# Altium PCB 00.main.PcbDoc (part 1 of 2)
Units mm, origin at the board's own origin, x right, y up, seen from the top; angles counter-clockwise.
Board outline 186 x 60 mm, 2 copper layers (Top Layer, Bottom Layer); 117 components, 80 nets, 547 pads, 161 vias.
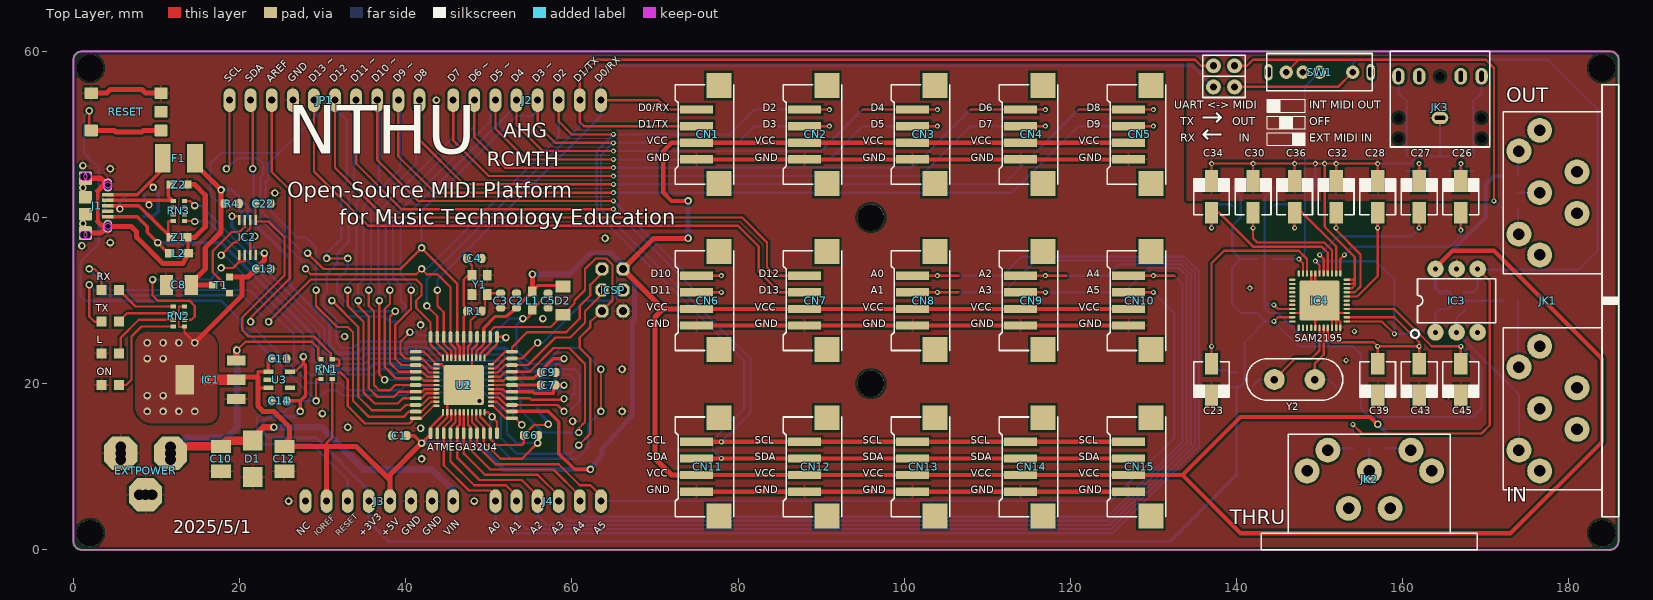
[diagram p0: Top Layer view]
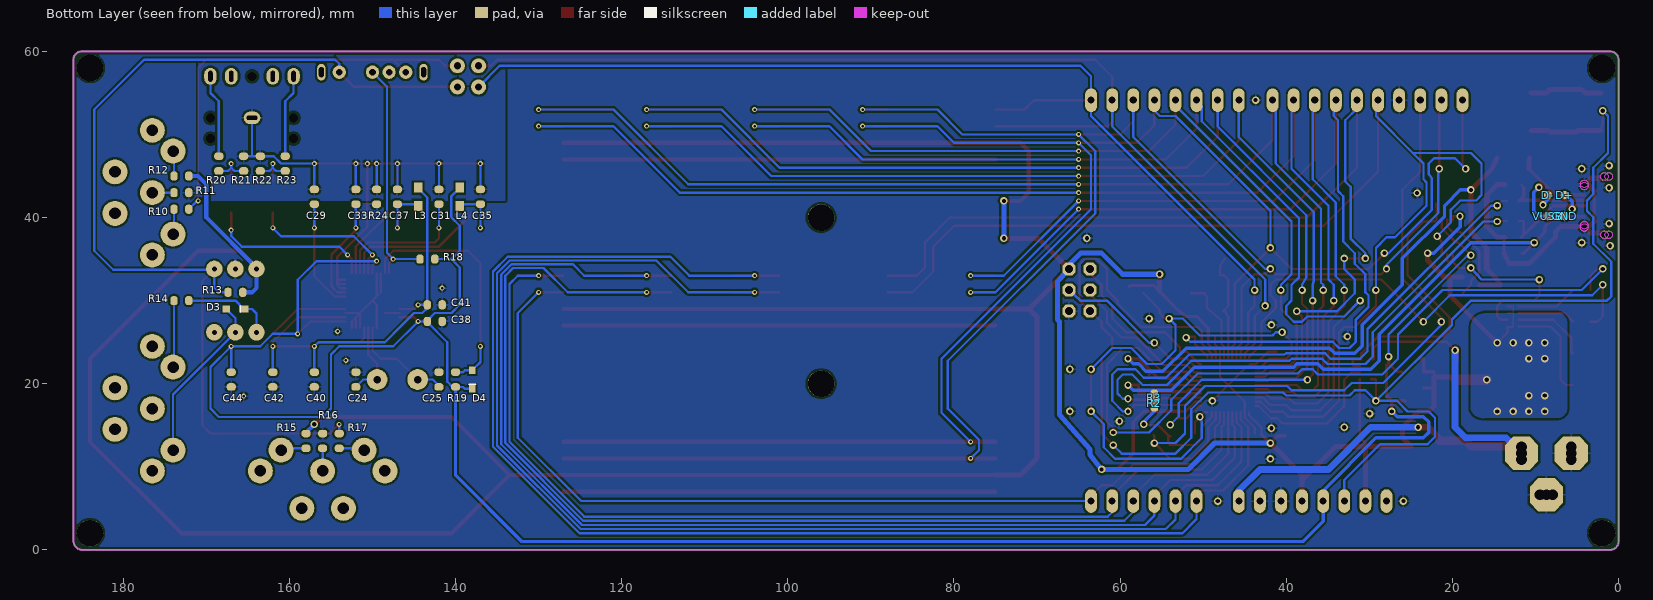
[diagram p1: Bottom Layer view, seen from below]

## Layer stack, top to bottom
Top Layer: signal copper 0.0356
Dielectric: dielectric 0.32, FR-4, Dk 4.8
Bottom Layer: signal copper 0.0356

## Board outline
1,0 cw(c1,1) 0,1 0,59 cw(c1,59) 1,60 185,60 cw(c185,59) 186,59 186,1.1 cw(c184.9,1.1) 184.9,0
cut-out: 4.14,38.364 ccw(c4.14,38.814) 4.59,38.814 ccw(c4.14,38.814) 4.14,39.264 ccw(c4.14,38.814) 3.69,38.814 ccw(c4.14,38.814)
cut-out: 4.14,38.618 ccw(c4.14,39.068) 4.59,39.068 ccw(c4.14,39.068) 4.14,39.518 ccw(c4.14,39.068) 3.69,39.068 ccw(c4.14,39.068)
cut-out: 1.194,37.475 ccw(c1.194,37.925) 1.644,37.925 ccw(c1.194,37.925) 1.194,38.375 ccw(c1.194,37.925) 0.744,37.925 ccw(c1.194,37.925)
cut-out: 1.702,37.475 ccw(c1.702,37.925) 2.152,37.925 ccw(c1.702,37.925) 1.702,38.375 ccw(c1.702,37.925) 1.252,37.925 ccw(c1.702,37.925)
cut-out: 1.194,44.485 ccw(c1.194,44.935) 1.644,44.935 ccw(c1.194,44.935) 1.194,45.385 ccw(c1.194,44.935) 0.744,44.935 ccw(c1.194,44.935)
cut-out: 1.702,44.485 ccw(c1.702,44.935) 2.152,44.935 ccw(c1.702,44.935) 1.702,45.385 ccw(c1.702,44.935) 1.252,44.935 ccw(c1.702,44.935)
cut-out: 4.14,43.342 ccw(c4.14,43.792) 4.59,43.792 ccw(c4.14,43.792) 4.14,44.242 ccw(c4.14,43.792) 3.69,43.792 ccw(c4.14,43.792)
cut-out: 4.14,43.596 ccw(c4.14,44.046) 4.59,44.046 ccw(c4.14,44.046) 4.14,44.496 ccw(c4.14,44.046) 3.69,44.046 ccw(c4.14,44.046)

## Design rules (kind name [scope] priority, off if disabled: settings)
Clearance [All] p1: gap=0.152
HoleSize [All] p1: absolutevalues=TRUE maxlimit=5.08 minlimit=0.025 maxpercent=80.000 minpercent=20.000
HoleToHoleClearance [All] p1: gap=0.127 allowstackedmicrovias=TRUE
MinimumSolderMaskSliver [All] p1: minsoldermaskwidth=0
PolygonConnect [All] p1: connectstyle=Relief reliefconductorwidth=0.254 reliefentries=4 polygonreliefangle="90 Angle" airgapwidth=0.254
RoutingVias [All] p1: holewidth=0.3 width=0.6 viastyle="Through Hole" minholewidth=0.3 minwidth=0.6 maxholewidth=0.5 maxwidth=1
SilkToSilkClearance [All] p1 off: silktosilkclearance=0.254
SilkToSolderMaskClearance [IsPad] p1 off: minsilkscreentomaskgap=0.254 clearancetoexposedcopper=TRUE
SolderMaskExpansion [All] p1: expansion=0.102
Width [All] p1: maxlimit=2.54 minlimit=0.203 preferedwidth=0.305
23 further rules are at their usual default settings.

## Classes and differential pairs
component class 02.Interfaces: CN1 CN2 CN3 CN4 CN5 CN6 CN7 CN8 CN9 CN10 CN11 CN12 CN13 CN14 CN15 D3 IC3 JK1 JK2 R10 R11 R12 R13 R14 R15 R16 R17 "UART <-> MIDI"
component class 01.Leonardo_Rev3d: C1 C2 C3 C4 C5 C6 C7 C8 C9 C10 C11 C12 C13 C14 C22 D1 D2 D+ D- EXTPOWER F1 GND IC1 IC2 ICSP J1 J2 J3 J4 JP1 L L1 L2 ON R1 R2 R3 R4 RESET RN1 RN2 RN3 RX T1 TX U1 U2 U3 VUSB Y1 Z1 Z2
component class 03.SAM2195: C23 C24 C25 C26 C27 C28 C29 C30 C31 C32 C33 C34 C35 C36 C37 C38 C39 C40 C41 C42 C43 C44 C45 D4 IC4 JK3 L3 L4 R18 R19 R20 R21 R22 R23 R24 SW1 Y2

## Components (designator, comment, footprint, x,y, rotation, side; value= is the part's Value field where it differs from the comment)
C1 "100n" C0603-ROUND 39.235,13.755 r180 top
C2 "100n" C0603-ROUND 53.34,30 r90 top
C3 "22p" C0603-ROUND 51.435,30 r90 top
C4 "22p" C0603-ROUND 48.26,35.08 r0 top
C5 "1uF" C0603-ROUND 57.15,30 r270 top
C6 "100n" C0603-ROUND 55.075,13.78 r0 top
C7 "1uF" C0603-ROUND 57.15,19.84 r0 top
C8 "10u" SMC_B 12.7,31.905 r180 top
C9 "100n" C0603-ROUND 57.15,21.364 r180 top
C10 "10u" SMC_B 17.78,10.95 r270 top
C11 "1uF" C0603-ROUND 24.765,23.015 r180 top
C12 "10u" SMC_B 25.4,10.95 r270 top
C13 "100n" C0603-ROUND 22.86,33.81 r0 top
C14 "1uF" C0603-ROUND 24.765,17.935 r0 top
C22 "100n" C0603-ROUND 22.86,41.684 r180 top
C23 "1uF" "Cap SMD 4x5.3" 137,20.5 r270 top
C24 "22pF" C0603-ROUND 152,20.5 r270 bottom
C25 "22pF" C0603-ROUND 142,20.5 r270 bottom
C26 "2.2uF" "Cap SMD 4x5.3" 167,42.5 r90 top
C27 "2.2uF" "Cap SMD 4x5.3" 162,42.5 r90 top
C28 "10uF" "Cap SMD 4x5.3" 157,42.5 r90 top
C29 "100nF" C0603-ROUND 157,42.5 r90 bottom
C30 "1uF" "Cap SMD 4x5.3" 142,42.5 r90 top
C31 "100nF" C0603-ROUND 142,42.5 r90 bottom
C32 "10uF" "Cap SMD 4x5.3" 152,42.5 r90 top
C33 "100nF" C0603-ROUND 152,42.5 r90 bottom
C34 "1uF" "Cap SMD 4x5.3" 137,42.5 r90 top
C35 "100nF" C0603-ROUND 137,42.5 r90 bottom
C36 "1uF" "Cap SMD 4x5.3" 147,42.5 r90 top
C37 "100nF" C0603-ROUND 147,42.5 r90 bottom
C38 "100nF" C0603-ROUND 142.5,27.5 r180 bottom
C39 "1uF" "Cap SMD 4x5.3" 157,20.5 r270 top
C40 "100nF" C0603-ROUND 157,20.5 r270 bottom
C41 "100nF" C0603-ROUND 142.5,29.5 r180 bottom
C42 "470pF" C0603-ROUND 162,20.5 r270 bottom
C43 "2.2uF" "Cap SMD 4x5.3" 162,20.5 r270 top
C44 "100nF" C0603-ROUND 167,20.5 r270 bottom
C45 "4.7uF" "Cap SMD 4x5.3" 167,20.5 r270 top
CN1 "2.54mm 1X4" Grove-4P-180D 75,50 r90 top
CN2 "2.54mm 1X4" Grove-4P-180D 88,50 r90 top
CN3 "2.54mm 1X4" Grove-4P-180D 101,50 r90 top
CN4 "2.54mm 1X4" Grove-4P-180D 114,50 r90 top
CN5 "2.54mm 1X4" Grove-4P-180D 127,50 r90 top
CN6 "2.54mm 1X4" Grove-4P-180D 75,30 r90 top
CN7 "2.54mm 1X4" Grove-4P-180D 88,30 r90 top
CN8 "2.54mm 1X4" Grove-4P-180D 101,30 r90 top
CN9 "2.54mm 1X4" Grove-4P-180D 114,30 r90 top
CN10 "2.54mm 1X4" Grove-4P-180D 127,30 r90 top
CN11 "2.54mm 1X4" Grove-4P-180D 75,10 r90 top
CN12 "2.54mm 1X4" Grove-4P-180D 88,10 r90 top
CN13 "2.54mm 1X4" Grove-4P-180D 101,10 r90 top
CN14 "2.54mm 1X4" Grove-4P-180D 114,10 r90 top
CN15 "2.54mm 1X4" Grove-4P-180D 127,10 r90 top
D1 "M7" SMB 21.59,10.95 r270 top
D2 "CD1206-S01575" MINIMELF 58.928,30 r270 top
D3 "1N4148" SOD-323 166.5,29 r180 bottom
D4 "1N4148" SOD-323 138,20.5 r270 bottom
D+ "DNP" TP-1.00MM 6.5,42.7 r0 top
D- "DNP" TP-1.00MM 8.509,42.7 r0 top
EXTPOWER "POWERSUPPLY_DC21MMX" POWERSUPPLY_DC-21MM 5.334,11.712 r90 top
F1 "MF-MSMF050-2 500mA" L1812 12.7,47.145 r180 top
GND "DNP" TP-1.00MM 6.5,40.16 r0 top
IC1 "NCP1117ST50T3G" SOT223 16.51,20.475 r90 top
IC2 "LMV358IDGKR" MSOP08 20.955,37.62 r0 top
IC3 "PC900" DIP-6 166.5,30 r90 top
IC4 "SAM2195" QFN44ML7X7 150,30 r270 top
ICSP "ICSP" 2X03 64.897,31.27 r270 top
J1 "USB Micro" CON2_USB_MICRO_B_AT 1.448,41.43 r270 top
J2 "8x1F-H8.5" 1X08 54.61,54.13 r180 top
J3 "8x1F-H8.5" 1X08 36.83,5.87 r0 top
J4 "6x1F-H8.5" 1X06 57.15,5.87 r0 top
JK1 "Jack MIDI-Dual" HDC-052 177.5,30 r90 top
JK2 "Jack MIDI" HDC-052-01 156,8.5 r0 top
JK3 "Jack 3.5mm PhoneJack" "PhoneJack EJ05-06-PF" 164.5,52 r90 top
JP1 "10x1F-H8.5" 1X10 30.226,54.13 r180 top
L "Yellow" CHIPLED_0805 4.445,23.65 r90 top
L1 "MH2029-300Y" 0805 55.245,30 r270 top
L2 "MH2029-300Y" 0805 12.7,35.715 r0 top
L3 "742792093" 0805 144.5,42.5 r270 bottom
L4 "742792093" 0805 139.5,42.5 r270 bottom
ON "Green" CHIPLED_0805 4.445,19.84 r90 top
R1 "1M" R0603-ROUND 48.26,28.73 r0 top
R2 "NM" R0402 55.88,17.656 r90 bottom
R3 "NM" R0402 55.88,18.291 r90 bottom
R4 "10K" R0603-ROUND 19.05,41.684 r180 top
R10 "220R" R0603-ROUND 173,41 r0 bottom
R11 "0R" R0603-ROUND 173,43 r0 bottom
R12 "220R" R0603-ROUND 173,45 r0 bottom
R13 "220R" R0603-ROUND 166.5,31 r180 bottom
R14 "220R" R0603-ROUND 173,30 r180 bottom
R15 "220R" R0603-ROUND 158,13.111 r270 bottom
R16 "0R" R0603-ROUND 156,13.111 r270 bottom
R17 "220R" R0603-ROUND 154,13.111 r270 bottom
R18 "100K NC" R0603-ROUND 143.389,35 r0 bottom
R19 "10K" R0603-ROUND 140,20.5 r270 bottom
R20 "220" R0603-ROUND 168.5,46.5 r270 bottom
R21 "3.3K" R0603-ROUND 165.5,46.5 r90 bottom
R22 "3.3K" R0603-ROUND 163.5,46.5 r270 bottom
R23 "220" R0603-ROUND 160.5,46.5 r270 bottom
R24 "0" R0603-ROUND 149.5,42.5 r90 bottom
RESET "TS42" TS42 6.35,52.733 r180 top
RN1 "10K" CAY16 30.48,21.745 r270 top
RN2 "1K" CAY16 12.7,28.095 r90 top
RN3 "22R" CAY16 12.7,40.795 r90 top
RX "Yellow" CHIPLED_0805 4.445,31.27 r90 top
SW1 "Switch 1P3T" "SW 1P3T - SS13D01" 150,57.5 r0 top
T1 "FDN340P" SOT-23 17.78,31.905 r270 top
TX "Yellow" CHIPLED_0805 4.445,27.46 r90 top
U1 "ATMEGA32U4-XUMU" QFN44ML7X7 46.99,19.84 r180 top
U2 "ATMEGA32U4" TQFP44-PAD 46.99,19.84 r180 top
U3 "LP2985-33DBVR" SOT23-DBV 24.765,20.475 r270 top
"UART <-> MIDI" "2X2P" A2541WV0-2X2P 138.5,57 r90 top
VUSB "DNP" TP-1.00MM 8.509,40.16 r90 top
Y1 "16MHz KX-7" CRYSTAL-3.2-2.5 48.895,31.905 r270 top
Y2 "9.6MHz" "HC-49S DIP" 147,20.5 r0 top
Z1 "CG0603MLC-05E" CT/CN0603 12.7,37.62 r0 top
Z2 "CG0603MLC-05E" CT/CN0603 12.7,43.97 r0 top

## Footprints (in the part's own frame and the unit in brackets; to place one, negate y for a bottom-side part, rotate by r counter-clockwise, add the part's x,y. Pads: shape width x height; smd on the part's side, far side on the other; paste and mask are expansions set on the pad)
1X06 [mil] "1X06"
  oval 56x112 hole 33.46: 1(-250,0) 2(-150,0) 3(-50,0) 4(50,0) 5(150,0) 6(250,0)
1X08 [mil] "1X08"
  oval 56x112 hole 33.46: 1(-350,0) 2(-250,0) 3(-150,0) 4(-50,0) 5(50,0) 6(150,0) 7(250,0) 8(350,0)
1X10 [mil] "1X10"
  oval 56x112 hole 33.46: 1(-450,0) 2(-350,0) 3(-250,0) 4(-150,0) 5(-50,0) 6(50,0) 7(150,0) 8(250,0) 9(350,0) 10(450,0)
2X03 [mm] "2X03"
  oct 1.55x1.55 / inner round 1.432 / far side oct 1.55x1.55 hole 0.95: 1(-2.54,-1.27) 2(-2.54,1.27) 3(0,-1.27) 4(0,1.27) 5(2.54,-1.27) 6(2.54,1.27)
0805 [mm] "0805"
  rect 1.2x1 smd: 1(-1.1,0) 2(1.1,0)
A2541WV0-2X2P [mm]
  round 1.8 hole 0.85: 1(-1.27,-1.27) 2(-1.27,1.27) 3(1.27,-1.27) 4(1.27,1.27)
  silkscreen extent -2.54,-2.54 2.54,2.54
C0603-ROUND [mil] "C0603-ROUND"
  rrect80% 35.37x43.31 smd: 1(-35,0) 2(35,0)
"Cap SMD 4x5.3" [mm]
  rect 2.6x1.6 smd: 1(-1.9,0) 2(1.9,0)
  silkscreen extent -2.15,-2.15 2.25,2.15
CAY16 [mm] "CAY16"
  rect 0.5x0.65 smd: 1(-1.2,-0.675) 2(-0.4,-0.675) 3(0.4,-0.675) 4(1.2,-0.675) 5(1.2,0.675) 6(0.4,0.675) 7(-0.4,0.675) 8(-1.2,0.675)
CHIPLED_0805 [mm] "CHIPLED_0805"
  rect 1.2x1.2 smd: A(0,-1.05) C(0,1.05)
CON2_USB_MICRO_B_AT [mil] "CON2_USB_MICRO_B_AT"
  rrect10% 16x53 smd: P1(-52,106) P2(-26,106) P3(0,106) P4(26,106) P5(52,106)
  rrect20% 65x61 smd paste-32.5: S1(-130,0) S2(130,0)
  rrect80% 60x40 smd paste-30: S3(-98,106) S4(98,106)
  rrect10% 60x60 smd: S5(-40,0) S6(40,0)
CRYSTAL-3.2-2.5 [mm] "CRYSTAL-3.2-2.5"
  rect 1.3x1.05 smd: 1(-1.15,-0.925) 2(1.15,-0.925) 3(1.15,0.925) 4(-1.15,0.925)
CT/CN0603 [mm] "CT/CN0603"
  rect 1x1 smd: 1(-1,0) 2(1,0)
DIP-6 [mm]
  round 2 hole 0.6: 1(-3.81,2.54) 2(-3.81,0) 3(-3.81,-2.54) 4(3.81,-2.54) 5(3.81,0) 6(3.81,2.54)
  silkscreen extent -4.5,-4.7 2.65,5.5
Grove-4P-180D [mm]
  rect 1x4 smd: 1(3,0) 2(1,0) 3(-1,0) 4(-3,0)
  rect 3x3 smd: ""(-5.9,-2.7) ""(5.9,-2.7)
  silkscreen extent -6,-4.5 6,2.55
"HC-49S DIP" [mm]
  round 2.5 hole 0.9: 1(-2.44,0) 2(2.44,0)
  silkscreen extent -5.8,-2.5 5.8,2.5
HDC-052 [mm]
  round 3 hole 1.4: 1(20.5,1) 1'(-5.5,1) 2(13,1) 2'(-13,1) 3(5.5,1) 3'(-20.5,1) 4(18,3.5) 4'(-8,3.5) 5(8,3.5) 5'(-18,3.5) G(-15.5,-3.5) G(-10.5,-3.5) G(10.5,-3.5) G(15.5,-3.5)
  silkscreen extent -26,-8.5 26,5.4
HDC-052-01 [mm]
  round 3 hole 1.4: 1(7.5,1) 2(0,1) 3(-7.5,1) 4(5,3.5) 5(-5,3.5) G(-2.5,-3.5) G(2.5,-3.5)
  silkscreen extent -13,-8.5 13,5.4
L1812 [mm] "L1812"
  rect 1.9x3.4 smd: 1(-1.95,0) 2(1.95,0)
MINIMELF [mm] "MINIMELF"
  rect 1.4x1.8 smd: A(1.7,0) C(-1.7,0)
MSOP08 [mm] "MSOP08"
  rect 0.3x1.2 smd: 1(-0.976,-2.113) 2(-0.326,-2.113) 3(0.324,-2.113) 4(0.974,-2.113) 5(0.974,2.112) 6(0.324,2.112) 7(-0.326,2.112) 8(-0.976,2.112)
"PhoneJack EJ05-06-PF" [mm]
  round 0 hole 1.1: 0(-2.5,5) 0(-2.5,-5) 0(0,5) 0(0,-5) 0(5,0)
  oval 1.5x2 hole 0.5 slot 1.3 at 90 deg: 1(0,0)
  oval 2x1.5 hole 0.5 slot 1.3 at 0 deg: 2(5,5) 3(5,2.5) 4(5,-2.5) 5(5,-5)
  silkscreen extent -3.5,-6 8,6
POWERSUPPLY_DC-21MM [mil] "POWERSUPPLY_DC-21MM"
  round 76.77 hole 51.18: 1(-200,-162) 1(-200,-102) 2(-33,-250) 2(27,-250) 3(-33,-14) 3(27,-14)
  oct 157.48x157.48 / inner round 145.49 / far side oct 157.48x157.48 hole 51.18: 1(-200,-132) 2(-3,-250) 3(-3,-14)
QFN44ML7X7 [mm] "QFN44ML7X7"
  rrect80% 0.75x0.275 smd: 1(-3.275,2.5) 2(-3.275,2) 3(-3.275,1.5) 4(-3.275,1) 5(-3.275,0.5) 6(-3.275,0) 7(-3.275,-0.5) 8(-3.275,-1) 9(-3.275,-1.5) 10(-3.275,-2) 11(-3.275,-2.5) 23(3.275,-2.5) 24(3.275,-2) 25(3.275,-1.5) 26(3.275,-1) 27(3.275,-0.5) 28(3.275,0) 29(3.275,0.5) 30(3.275,1) 31(3.275,1.5) 32(3.275,2) 33(3.275,2.5)
  rrect80% 0.275x0.75 smd: 12(-2.5,-3.275) 13(-2,-3.275) 14(-1.5,-3.275) 15(-1,-3.275) 16(-0.5,-3.275) 17(0,-3.275) 18(0.5,-3.275) 19(1,-3.275) 20(1.5,-3.275) 21(2,-3.275) 22(2.5,-3.275) 34(2.5,3.275) 35(2,3.275) 36(1.5,3.275) 37(1,3.275) 38(0.5,3.275) 39(0,3.275) 40(-0.5,3.275) 41(-1,3.275) 42(-1.5,3.275) 43(-2,3.275) 44(-2.5,3.275)
  rrect10% 4.826x4.826 smd paste-2.413 mask-2.413: EXP(0,0)
R0402 [mm] "R0402"
  rrect90% 0.7x0.9 smd: 1(-0.65,0) 2(0.65,0)
R0603-ROUND [mil] "R0603-ROUND"
  rrect80% 35.37x43.31 smd: 1(-35,0) 2(35,0)
SMB [mm] "SMB"
  rect 2.4x2.4 smd: A(2.2,0) C(-2.2,0)
SMC_B [mm] "SMC_B"
  rect 1.6x2.4 smd: +(-1.5,0) -(1.5,0)
SOD-323 [mm] "SOT23, 3-Leads, Body 2.9x1.3mm, Pitch 0.95mm, Lead Span 2.5mm, IPC Medium Density"
  rect 0.9x0.8 smd: 1(-1.125,0) 2(1.125,0)
  silkscreen extent 0.57,-0.4 0.57,0.4
SOT23-DBV [mm] "SOT23-DBV"
  rect 0.55x1.2 smd: 1(-0.95,-1.3) 2(0,-1.3) 3(0.95,-1.3) 4(0.95,1.3) 5(-0.95,1.3)
SOT223 [mil] "SOT223"
  rect 48x88 smd: 1(-91,-122) 2(0,-122) 3(91,-122)
  rect 141.73x86.61 smd: 4(0,122.01)
SOT-23 [mil] "SOT-23"
  rect 31x35 smd: 1(1,-40) 2(-37,40) 3(39,40)
"SW 1P3T - SS13D01" [mm]
  oval 1x2 hole 0.6 slot 1.2 at 90 deg: 0(-6.15,0) 0(6.15,0)
  round 1.6 hole 0.8: 1(-4,0) 2(-2,0) 3(4,0) COM(0,0)
  silkscreen extent -6.35,-2.25 6.35,2.25
TP-1.00MM [mm] "TP-1.00MM"
  rrect100% 1x1 smd far side paste-0.5: X(0,0)
TQFP44-PAD [mm] "TQFP44-PAD"
  rrect80% 1.4x0.45 smd: 1(-5.8,4) 2(-5.8,3.2) 3(-5.8,2.4) 4(-5.8,1.6) 5(-5.8,0.8) 6(-5.8,0) 7(-5.8,-0.8) 8(-5.8,-1.6) 9(-5.8,-2.4) 10(-5.8,-3.2) 11(-5.8,-4) 23(5.8,-4) 24(5.8,-3.2) 25(5.8,-2.4) 26(5.8,-1.6) 27(5.8,-0.8) 28(5.8,0) 29(5.8,0.8) 30(5.8,1.6) 31(5.8,2.4) 32(5.8,3.2) 33(5.8,4)
  rrect80% 0.45x1.4 smd: 12(-4,-5.8) 13(-3.2,-5.8) 14(-2.4,-5.8) 15(-1.6,-5.8) 16(-0.8,-5.8) 17(0,-5.8) 18(0.8,-5.8) 19(1.6,-5.8) 20(2.4,-5.8) 21(3.2,-5.8) 22(4,-5.8) 34(4,5.8) 35(3.2,5.8) 36(2.4,5.8) 37(1.6,5.8) 38(0.8,5.8) 39(0,5.8) 40(-0.8,5.8) 41(-1.6,5.8) 42(-2.4,5.8) 43(-3.2,5.8) 44(-4,5.8)
  rrect100% 1x1 smd: P$1(0,0)
TS42 [mm] "TS42"
  rrect15% 1.6x1.4 smd: 1(-4.2,2.25) 2(4.2,2.25) 3(-4.2,-2.25) 4(4.2,-2.25)
  rrect15% 1.6x1.4 smd paste-0.8: 5(-4.2,0)

## Part data
C1 C2 C3 C4 C5 C6 C7 C9 C11 C13 C14 C22: library part C-EUC0603, "CAPACITOR, European symbol"
C8 C10 C12: library part CPOL-EUSMCB, "POLARIZED CAPACITOR, European symbol"
C23 C26 C27 C28 C30 C32 C34 C36 C39 C43 C45: library part "Capacitor Polar"
C24 C25 C29 C31 C33 C35 C37 C38 C40 C41 C42 C44: library part "Capacitor Non-Polar"
CN1 CN2 CN3 CN4 CN5 CN6 CN7 CN8 CN9 CN10 CN11 CN12 CN13 CN14 CN15: library part "Connector 1X4"
D1: library part DIODE-SMB, "DIODE"
D2: library part DIODE-MINIMELF, "DIODE"
D3 D4: library part "Diode 1N4148"
D+ D- GND VUSB: library part TPTP-1.00MM, "Testpoint"
F1: library part L-EUL1812, "INDUCTOR, European symbol"
IC1: library part MC33269ST*, "Adjustable Output Low Dropout Voltage Regulator 800 mA   Source: http://www.onsemi.com/pub/Collateral/MC33269-D.PDF"
IC2: library part LMV358?*MM, "Dual General Purpose, Low Voltage, Rail-to-Rail Output Operational Amplifiers   Source: http://www.national.com/mpf/LM/LMV321.html http://www.national.com/dt/lmv_qual.pdf"
IC3: library part "Optoisolator PC900", "Sharp PC900 Optoisolator"
IC4: library part "IC SAM2195"
ICSP: library part PINHD-2X3, "PIN HEADER"
J1: library part USB-MICRO-LEGACY
J2 J3: library part PINHD-1X8, "PIN HEADER"
J4: library part PINHD-1X6, "PIN HEADER"
JK1: "Dual MIDI Connector"
JP1: library part PINHD-1X10, "PIN HEADER"
L ON RX TX: library part LEDCHIPLED_0805, "LED   OSRAM: - CHIPLED LG R971, LG N971, LY N971, LG Q971, LY Q971, LO R971, LY R971 LH N974, LH R974 LS Q976, LO Q976, LY Q976 LO Q996 - Hyper CHIPLED LW Q18S LB Q993, LB Q99A, LB R99A - SideLED LS A670, LO A670, LY A670, LG A670, LP A670 LB A673, LV A673, LT A673, LW A673 LH A674 LY A675 LS A676, LA A676, LO A676, LY A676, LW A676 LS A679, LY A679, LG A679 -  Hyper Micro SIDELED® LS Y876, LA Y876, LO Y876, LY Y876 LT Y87S - SmartLED LW L88C, LW L88S LB L89C, LB L89S, LG L890 LS L89K, LO L89K, LY L89K LS L896, LA L896, LO L896, LY L896 - TOPLED LS T670, LO T670, LY T670, LG T670, LP T670 LSG T670, LSP T670, LSY T670, LOP T670, LYG T670 LG T671, LOG T671, LSG T671 LB T673, LV T673, LT T673, LW T673 LH T674 LS T676, LA T676, LO T676, LY T676, LB T676, LH T676, LSB T676, LW T676 LB T67C, LV T67C, LT T67C, LS T67K, LO T67K, LY T67K, LW E67C LS E67B, LA E67B, LO E67B, LY E67B, LB E67C, LV E67C, LT E67C LW T67C LS T679, LY T679, LG T679 LS T770, LO T770, LY T770, LG T770, LP T770 LB T773, LV T773, LT T773, LW T773 LH T774 LS E675, LA E675, LY E675, LS T675 LS T776, LA T776, LO T776, LY T776, LB T776 LHGB T686 LT T68C, LB T68C - Hyper Mini TOPLED® LB M676 - Mini TOPLED Santana® LG M470 LS M47K, LO M47K, LY M47K    Source: http://www.osram.convergy.de   LUXEON: - LUMILED® LXK2-PW12-R00, LXK2-PW12-S00, LXK2-PW14-U00, LXK2-PW14-V00 LXK2-PM12-R00, LXK2-PM12-S00, LXK2-PM14-U00 LXK2-PE12-Q00, LXK2-PE12-R00, LXK2-PE12-S00, LXK2-PE14-T00, LXK2-PE14-U00 LXK2-PB12-K00, LXK2-PB12-L00, LXK2-PB12-M00, LXK2-PB14-N00, LXK2-PB14-P00, LXK2-PB14-Q00 LXK2-PR12-L00, LXK2-PR12-M00, LXK2-PR14-Q00, LXK2-PR14-R00 LXK2-PD12-Q00, LXK2-PD12-R00, LXK2-PD12-S00 LXK2-PH12-R00, LXK2-PH12-S00 LXK2-PL12-P00, LXK2-PL12-Q00, LXK2-PL12-R00    Source: www.luxeon.com   KINGBRIGHT:   KA-3528ASYC Source: www.kingbright.com"
L1 L2: library part WE-CBF_0805, "SMD EMI Suppression Ferrite Beads - excellent anti-EMI properties - low DCR - impedances till 3000 ohms - rated current up to 6 A"
L3 L4: library part Inductor, "Inductor"
R1 R4: library part R-EU_R0603, "RESISTOR, European symbol"
R2 R3: library part R-EU_R0402, "RESISTOR, European symbol"
R10 R11 R12 R13 R14 R15 R16 R17 R18 R19 R20 R21 R22 R23 R24: library part Resistor
RESET: "TS42 Dongnan Electronics Tact switch VDC 12V - 50mA"
RN1 RN2 RN3: library part 4R-NCAY16, "Array Chip Resistor   Source: RS Component / Phycomp"
T1: library part PMOSSOT23, "MOS FET"
U2: library part ATMEGA32U4-XUAU
U3: library part LP2985-XXDBVR, "ULTRALOW-POWER 50-mA LOW-DROPOUT LINEAR REGULATORS   50-mA Low-Dropout Regulator Source: http://focus.ti.com/lit/ds/symlink/tps77001.pdf"
"UART <-> MIDI": library part "Connector 2X2"
Y1: library part CRYSTAL-3.2-2.5
Y2: library part Crystal
Z1 Z2: library part VARISTORCN0603, "VARISTOR"

## Free pads (board coordinates)
  round 1 hole 0.9 unplated: MH1(1.702,44.935) MH2(1.194,44.935) MH3(1.702,37.925) MH4(1.194,37.925) MH5(4.14,44.046) MH6(4.14,43.792) MH7(4.14,39.068) MH8(4.14,38.814)
  round 3.2 hole 3.2 unplated: MH1(184,58) MH2(184,2) MH3(2,58) MH4(2,2) MH5(96,40) MH6(96,20)

## Via types
v1: diameter 0.9/0.9 (per signal layer), hole 0.5, Top Layer to Bottom Layer, 100 vias
v2: diameter 0.6, hole 0.3, Top Layer to Bottom Layer, 61 vias

## Nets (pads, with @x,y where several pads share a name; then routed paths per layer and width w, separated by ;. In a path a pad name is that pad's centre, name@x,y a point inside that pad or via, vN(x,y) a via of type N, cw(c..) or ccw(c..) an arc to the next point about the centre after c; other vN are vias at no path point)
+3V3: C14.2 C38.1 C44.1 C45.1 D4.2 IC2.6 IC4.6 IC4.21 IC4.34 IC4.37 J3.4 L4.1 R18.1 R19.2 U3.5 | length 312.5
  Top Layer w0.275: v1(17.78,35.461) 19.304,36.985 19.558,36.985 21.279,38.706 IC2.6@21.279,39.732 ; U3.5@26.065,21.425 26.604,21.425 27.686,22.38 ; v2(144.5,27.5) 145,28 IC4.21@146.725,28 ; v2(149.5,34.75) 150,34.25 IC4.6@150,33.275 ; IC4.34@153.275,27.5 157.5,27.5 v2(159,26) ; IC4.37@153.275,29 159,29 163.5,24.5 v2(167,24.5) C45.1@167,22.4
  Top Layer w0.406: C14.2@25.654,17.935 27.305,17.935 ; v1(27.305,16.665) 27.305,17.935 ; v1(27.686,23.269) 27.686,22.38 27.94,22.253 27.94,18.57 27.305,17.935
  Bottom Layer w0.275: v1(17.78,35.461) 17.907,35.461 18.034,35.334 18.288,35.334 27.686,25.936 v1(27.686,23.269) ; D4.2@138,19.375 138.875,19.375 139.111,19.611 R19.2@140,19.611 140.361,19.611 141,20.25 141,23.5 141,25 143.389,27.389 C38.1@143.389,27.5 ; L4.1@139.5,43.6 140.5,42.6 140.5,40 139.5,39 139.5,36 140.5,35 ; R18.1@142.5,35 140.5,35 ; v2(149.5,34.75) 156.75,34.75 159,32.5 v2(159,26) 162,26 163.5,24.5 v2(167,24.5) ; C44.1@167,21.389 v2(167,24.5) ; 140.5,35 139.5,34 139.5,29.5 140.5,28.5 142.5,28.5 143.389,27.611 C38.1@143.389,27.5 ; C38.1@143.389,27.5 v2(144.5,27.5) 147.5,24.5 154,24.5 155,23.5 155,17 156,16 168.5,16 169.5,17 169.5,22 v2(167,24.5)
  Bottom Layer w0.406: v1(27.305,16.665) 26.67,16.03 23.495,16.03 22.86,15.395 22.86,14.125 23.495,13.49 29.21,13.49 35.56,7.14 J3.4@35.56,5.87 35.56,3.44 38,1 132,1 140,9 R19.2@140,19.611
+5V: C1.1 C2.1 C11.2 C12.+ C13.1 CN1.3 CN2.3 CN3.3 CN4.3 CN5.3 CN6.3 CN7.3 CN8.3 CN9.3 CN10.3 CN11.3 CN12.3 CN13.3 CN14.3 CN15.3 D2.C IC1.2 IC1.4 IC2.8 IC3.6 ICSP.2 J3.2 J3.5 L1.1 R12.1 R13.2 R15.1 RN1.5 RN2.1 RN2.3 RN2.4 T1.2 U1.2 U1.14 U1.34 U2.2 U2.14 U2.34 U3.1 U3.3 | length 562
  Top Layer w0.203: RN2.1@13.305,26.825 12.7,26.825 12.7,28.495 ; RN2.3@13.375,28.495 12.7,28.495 ; RN2.4@13.375,29.295 12.7,29.295 12.7,28.495
  Top Layer w0.275: RN2.1@13.305,26.825 RN2.1@13.375,26.895 13.375,26.15 v1(14.605,24.92) ; v1(19.09,40.16) 19.979,40.16 IC2.8@19.979,39.732 ; 30.48,12.45 30.48,12.855 31.155,13.53 RN1.5@31.155,20.545 ; U2.34@42.99,14.04 42.99,14.722 44.49,16.222 U1.34@44.49,16.565 ; U1.14@48.49,23.115 48.49,23.88 49.39,24.78 U2.14@49.39,25.64 ; U1.2@50.265,17.84 50.946,17.84 52.121,16.665 52.765,16.665 U2.2@52.79,16.64
  Top Layer w0.406: 22.225,19.459 U3.3@23.465,19.525 ; 22.225,20.795 22.225,21.425 U3.1@23.465,21.425 23.465,23 C11.2@23.876,23.015 ; C12.+@24.995,12.45 C12.+@25.4,12.45 ; C1.1@40.124,13.755 41.01,13.755 v1(41.91,12.855) 42.99,13.935 U2.34@42.99,14.04 ; U2.14@49.39,25.64 49.39,26.685 50.8,28.095 52.085,28.095 C2.1@53.34,29.111 53.495,29.35 L1.1@55.245,31.1 55.972,31.827 58.752,31.827 58.801,31.778 D2.C@58.928,31.7 ; U2.2@52.765,16.665 57.15,16.665 58.42,15.395 58.42,11.585 60.325,9.68 v1(62.23,9.68)
  Top Layer w0.508: v1(74,42) 72,42 71,43 71,48 72,49 CN1.3@75,49 CN2.3@88,49 CN3.3@101,49 CN4.3@114,49 CN5.3@127,49 ; CN11.3@75,9 CN12.3@88,9 CN13.3@101,9 CN14.3@114,9 CN15.3@127,9 133.5,9 ; CN6.3@75,29 CN9.3@114,29 CN10.3@127,29 ; v1(157,15.111) 156.111,16 140.5,16 133.5,9 ; IC3.6@163.96,33.81 163.96,33.96 166,36 171,36 184,23 184,13 173,2 140.5,2 133.5,9
  Top Layer w0.61: v1(14.605,24.92) 20.32,30.635 20.32,32.591 20.066,32.845 ; T1.2@18.796,32.845 20.066,32.845 ; IC1.2@19.609,20.475 19.929,20.795 22.225,20.795 22.225,19.459 22.225,17.3 22.86,16.665 24.13,16.665 26.035,14.76 26.035,13.49 C12.+@24.995,12.45 ; v1(22.987,35.715) 22.987,34.826 21.006,32.845 20.066,32.845 ; C12.+@25.4,12.45 30.48,12.45 ; J3.2@30.48,5.87 30.48,12.45 ; J3.5@38.1,5.87 38.1,8.41 ; v1(41.91,12.855) 38.1,9.045 38.1,8.41 ; L1.1@55.245,31.1 v1(55.245,33.175) ; v1(74,37.5) 69.857,37.5 ICSP.2@66.167,33.81 70.977,29 ; CN11.3@75,9 72,9 70,11 70,28.023 70.977,29 ; CN6.3@75,29 70.977,29 ; 30.48,12.45 34.06,12.45 38.1,8.41
  Top Layer w1.27: v1(15.875,20.475) IC1.2@19.609,20.475
  Bottom Layer w0.406: v1(19.09,40.16) 19.05,39.866 19.05,38.89 22.225,35.715 v1(22.987,35.715)
  Bottom Layer w0.508: v1(157,15.111) 158,14.111 R15.1@158,14 ; R13.2@165.611,31 164.5,31 163.96,31.54 IC3.6@163.96,33.81 163.96,33.96 170,40 170,44 171,45 R12.1@172.111,45
  Bottom Layer w0.61: v1(41.91,12.855) 48.641,12.855 51.816,9.68 v1(62.23,9.68) 63.627,11.458 63.627,12.093 67.31,16.284 67.31,27.46 67.564,27.714 67.564,32.286 ICSP.2@66.167,33.81 66.04,34.445 64.77,35.715 62.23,35.715 59.69,33.175 v1(55.245,33.175) ; v1(74,37.5) v1(74,42)
  other v1: 8.89,16.665 10.795,16.665 12.7,16.665 14.605,16.665 8.89,18.565 10.79,18.565 8.89,23.02 10.795,23.02 8.89,24.92 10.795,24.92 12.7,24.92
A0: CN8.1 J4.1 U1.36 U2.36 | length 169.3
  Top Layer w0.275: U1.36@45.49,16.565 45.49,15.647 44.59,14.748 U2.36@44.59,14.04 44.59,10.175 47.625,7.14 50.165,7.14 50.8,6.505 J4.1@50.8,5.87 ; CN8.1@101,33 106.5,33 v2(104,33)
  Bottom Layer w0.275: J4.1@50.8,5.87 50.8,3.7 52.5,2 125.086,2 135.5,12.414 135.5,33.5 133.714,35.286 114.139,35.286 111.853,33 v2(104,33)
A1: CN8.2 J4.2 U1.37 U2.37 | length 166.9
  Top Layer w0.275: U1.37@45.99,16.565 45.99,15.36 45.39,14.76 U2.37@45.39,14.04 45.39,10.645 48.26,7.775 52.07,7.775 53.34,6.505 J4.2@53.34,5.87 ; CN8.2@101,31 106.5,31 v2(104,31)
  Bottom Layer w0.275: J4.2@53.34,5.87 53.34,3.66 54.5,2.5 124.94,2.5 135,12.56 135,33.293 133.464,34.829 115.829,34.829 112,31 v2(104,31)
A2: CN9.1 J4.3 U1.38 U2.38 | length 149.7
  Top Layer w0.275: U1.38@46.49,16.565 46.49,15.073 46.19,14.773 U2.38@46.19,14.04 46.19,11.115 48.895,8.41 53.975,8.41 55.88,6.505 J4.3@55.88,5.87 ; CN9.1@114,33 119.5,33 v2(117,33)
  Bottom Layer w0.275: J4.3@55.88,5.87 55.88,4.12 57,3 124.793,3 134.5,12.707 134.5,33.147 133.275,34.372 125.872,34.372 124.5,33 v2(117,33)
A3: CN9.2 J4.4 U1.39 U2.39 | length 142.1
  Top Layer w0.275: U1.39@46.99,16.565 U2.39@46.99,14.04 46.99,11.585 49.53,9.045 55.88,9.045 58.42,6.505 J4.4@58.42,5.87 ; CN9.2@114,31 v2(117,31)
  Bottom Layer w0.275: J4.4@58.42,5.87 58.42,4.58 59.5,3.5 124.647,3.5 134,12.853 134,33 133.086,33.914 129.414,33.914 126.5,31 v2(117,31)
A4: CN10.1 J4.5 U1.40 U2.40 | length 129.5
  Top Layer w0.275: U1.40@47.49,16.565 47.49,15.073 47.79,14.773 U2.40@47.79,14.04 47.79,12.055 50.165,9.68 57.785,9.68 60.96,6.505 J4.5@60.96,5.87 ; CN10.1@127,33 132.5,33 v2(130,33)
  Bottom Layer w0.275: J4.5@60.96,5.87 60.96,4.54 61.5,4 124.5,4 133.5,13 133.5,32 132.5,33 v2(130,33)
A5: CN10.2 J4.6 U1.41 U2.41 | length 116
  Top Layer w0.275: U1.41@47.99,16.565 47.99,15.36 48.59,14.76 U2.41@48.59,14.04 48.59,12.525 50.8,10.315 58.42,10.315 60.96,7.775 62.23,7.775 63.5,6.505 J4.6@63.5,5.87 ; CN10.2@127,31 v2(130,31)
  Bottom Layer w0.275: J4.6@63.5,5.87 124.87,5.87 132.5,13.5 132.5,28.5 v2(130,31)
AGND: C6.1 R2.1 U1.43 U2.43 | length 15.3
  Top Layer w0.275: U1.43@48.99,16.565 48.99,15.986 50.19,14.786 U2.43@50.19,14.04 50.19,13.338 50.898,12.63 54,12.63 54.2,12.83 54.2,13.766 C6.1@54.186,13.78 ; C6.1@53.95,13.68 C6.1@54.186,13.78 ; v1(57.15,15.116) 57.064,15.03 55.436,15.03 C6.1@54.186,13.78
  Bottom Layer w0.406: R2.1@55.88,17.006 55.88,16.665 57.15,15.395 v1(57.15,15.116)
AGND_SAM2195: C28.2 C29.2 C30.2 C31.2 C32.2 C33.2 C34.2 C35.2 C36.2 C37.2 IC4.42 IC4.43 IC4.44 JK3.1 R21.2 R22.1 R24.2 | length 82.1
  Top Layer w0.275: C34.2@137,44.4 v2(137,46.5) v2(142,46.5) ; C30.2@142,44.4 v2(142,46.5) ; C36.2@147,44.4 v2(147,46.5) ; v2(149.5,46.482) 149.482,46.5 v2(147,46.5) ; v2@149.5,46.5 150.604,46.5 v2(150.622,46.482) 150.622,38.878 154.25,35.25 154.25,32.75 ; v2@150.622,46.5 v2(152,46.5) ; C32.2@152,44.4 v2(152,46.5) ; IC4.42@153.275,31.5 153.9,31.5 154.25,31.85 154.25,32.3 ; IC4.43@153.275,32 153.95,32 154.25,32.3 ; IC4.44@153.275,32.5 154,32.5 154.25,32.75 ; C28.2@157,44.4 v2(157,46.5) v2(152,46.5) ; v2(142,46.5) v2(147,46.5) ; 154.25,32.3 154.25,32.75
  Bottom Layer w0.275: C35.2@137,43.389 v2(137,46.5) ; C31.2@142,43.389 v2(142,46.5) ; C37.2@147,43.389 v2(147,46.5) ; R24.2@149.5,43.389 v2(149.5,46.482) ; C33.2@152,43.389 v2(152,46.5) ; C29.2@157,43.389 v2(157,46.5) 161,46.5 161.889,47.389 R22.1@163.5,47.389 164.5,47.389 ; JK3.1@164.5,52 164.5,47.389 ; R21.2@165.5,47.389 164.5,47.389
AREF: C6.2 JP1.8 U1.42 U2.42 | length 85.7
  Top Layer w0.275: v1(21.336,27.46) 21.336,27.968 26.035,32.667 26.035,43.335 23.876,45.494 JP1.8@23.876,54.13 ; U1.42@48.49,16.565 48.49,15.647 49.39,14.748 U2.42@49.39,14.04 49.39,12.995 51.435,10.95 53.975,10.95 v1(55.88,12.855) 55.88,13.696 C6.2@55.964,13.78
  Bottom Layer w0.275: v1(21.336,27.46) 21.336,27.079 28.321,20.094 32.131,20.094 33.02,19.205 39.37,19.205 39.878,19.713 49.784,19.713 52.197,17.3 52.197,13.998 53.34,12.855 v1(55.88,12.855)
AVCC: C5.1 L1.2 U1.24 U1.44 U2.24 U2.44 | length 73.5
  Top Layer w0.275: v1(40.513,26.19) 39.37,25.047 39.37,23.65 39.98,23.04 U2.24@41.19,23.04 41.215,23.015 42.012,23.015 43.18,21.847 43.569,21.847 U1.24@43.715,21.84 ; U1.44@49.49,16.565 49.909,16.565 v1(50.394,16.03) 50.99,15.434 U2.44@50.99,14.04 ; v1(54.102,27.841) 54.61,27.841 55.245,28.476 L1.2@55.245,28.9 55.695,29.35 C5.1@57.15,30.889 ; v1(63.5,16.665) v1(63.5,21.745)
  Bottom Layer w0.275: v1(40.513,26.19) 41.275,26.19 41.656,25.809 50.419,25.809 52.451,27.841 v1(54.102,27.841) 53.34,27.079 53.34,24.031 54.991,22.38 56.769,22.38 58.674,24.285 60.96,24.285 v1(63.5,21.745) ; v1(50.394,16.03) 50.165,15.395 50.165,13.49 52.705,10.95 60.579,10.95 61.976,12.347 61.976,15.141 v1(63.5,16.665)
CMP: C22.2 IC2.5 RN1.7 RN1.8 | length 34.6
  Top Layer w0.275: C22.2@21.971,41.684 21.971,41.298 21.929,41.256 IC2.5@21.929,39.732 22.136,39.525 23.495,39.525 25.4,37.62 25.4,33.048 20.32,27.968 20.32,26.444 21.082,25.682 28.956,25.682 30.988,23.65 30.988,23.112 RN1.8@31.155,22.945 ; RN1.8@31.045,22.945 RN1.8@31.155,22.945 ; RN1.7@31.155,22.145 31.896,22.145 32.004,22.253 32.004,22.761 31.82,22.945 RN1.8@31.155,22.945
D0/RX: "UART <-> MIDI.2" CN1.1 J2.1 U1.20 U2.20 | length 130
  Top Layer w0.275: v1(43.815,31.27) 43.815,29.365 44.59,28.59 U2.20@44.59,25.64 44.59,24.805 45.49,23.906 U1.20@45.49,23.115 ; J2.1@63.5,54.13 70.37,54.13 71.5,53 CN1.1@75,53
  Bottom Layer w0.275: v1(43.815,31.27) 43.815,32.54 63.5,52.225 J2.1@63.5,54.13 63.5,57 64.77,58.27 132.5,58.27
  Bottom Layer w0.305: 132.5,58.27 134.69,58.27 137.23,55.73
D1/TX: "UART <-> MIDI.4" CN1.2 J2.2 U1.21 U2.21 | length 136.8
  Top Layer w0.275: v1(42.545,29.365) 43.79,28.12 U2.21@43.79,25.64 43.79,24.843 44.99,23.643 U1.21@44.99,23.115 ; CN1.2@75,51 61.5,51 60.96,51.54 J2.2@60.96,54.13 60.96,56.96 63,59 135,59 135.73,58.27 137.23,58.27
  Bottom Layer w0.275: v1(42.545,29.365) 42.545,32.54 60.96,50.955 J2.2@60.96,54.13
D2/SDA: CN2.1 CN11.2 CN12.2 CN13.2 CN14.2 CN15.2 J2.3 JP1.9 U1.19 U2.19 | length 219.4
  Top Layer w0.275: JP1.9@21.336,54.13 21.59,53.876 v1(21.59,45.875) ; v1(27.94,33.81) 28.575,33.175 41.275,33.175 v1(41.91,33.81) 42.545,33.175 43.815,33.175 45.39,31.6 U2.19@45.39,25.64 45.39,24.844 45.99,24.244 U1.19@45.99,23.115 ; J2.3@58.42,54.13 58.42,51.58 60,50 v2(65,50) ; CN2.1@88,53 v2(91,53)
  Top Layer w0.508: CN11.2@75,11 v2(78,11) CN12.2@88,11 CN13.2@101,11 CN14.2@114,11 CN15.2@127,11
  Bottom Layer w0.275: v1(21.59,45.875) 21.59,45.748 21.717,45.621 21.717,40.541 27.94,34.318 v1(27.94,33.81) ; v1(41.91,33.81) 42.545,33.81 58.42,49.685 J2.3@58.42,54.13 ; v2(78,11) 77,12 77,13.25 80.75,17 80.75,22.75 63,40.5 63,48 v2(65,50) 79,50 82,53 v2(91,53)
D3/SCL: CN2.2 CN11.1 CN12.1 CN13.1 CN14.1 CN15.1 J2.4 JP1.10 U1.18 U2.18 | length 223
  Top Layer w0.275: v1(18.415,45.875) 18.796,46.256 JP1.10@18.796,54.13 ; v1(28.194,35.715) 30.099,33.81 39.37,33.81 v1(41.91,36.35) 46.19,32.07 U2.18@46.19,25.64 46.19,24.78 46.49,24.48 U1.18@46.49,23.115 ; J2.4@55.88,54.13 55.88,51.12 58,49 v2(65,49) ; CN2.2@88,51 v2(91,51)
  Top Layer w0.508: CN11.1@75,13 v2(78,13) CN12.1@88,13 CN13.1@101,13 CN14.1@114,13 CN15.1@127,13
  Bottom Layer w0.275: v1(18.415,45.875) 19.685,47.145 22.225,47.145 22.86,46.51 22.86,45.24 22.479,44.732 22.479,40.922 27.686,35.715 v1(28.194,35.715) ; v1(41.91,36.35) 41.91,40.795 53.34,52.225 55.245,52.225 55.88,52.86 J2.4@55.88,54.13 ; v2(78,13) 81.5,16.5 81.5,23 63.5,41 63.5,47.5 v2(65,49) 80,49 82,51 v2(91,51)
D4: CN3.1 J2.5 U1.25 U2.25 | length 115.9
  Top Layer w0.275: v1(40.64,31.27) 40.64,28.984 38.735,27.079 38.735,23.015 39.51,22.24 U2.25@41.19,22.24 41.948,22.24 42.848,21.34 U1.25@43.715,21.34 ; J2.5@53.34,54.13 53.34,51.16 56.5,48 v2(65,48) ; CN3.1@101,53 95,53 v2(104,53)
  Bottom Layer w0.275: v1(40.64,31.27) 40.64,31.905 39.37,33.175 39.37,39.525 53.34,53.495 J2.5@53.34,54.13 ; v2(65,48) 90,48 95,53 v2(104,53)